# Altium PCB PCB1.PcbDoc
Units mil, origin at the board's own origin, x right, y up, seen from the top; angles counter-clockwise.
Board outline 5872 x 3804 mil, 4 copper layers (LVDS, GND, REC_POW, CMOS), stack 24.449 mil thick; 31 components, 58 nets, 331 pads, 4 vias.
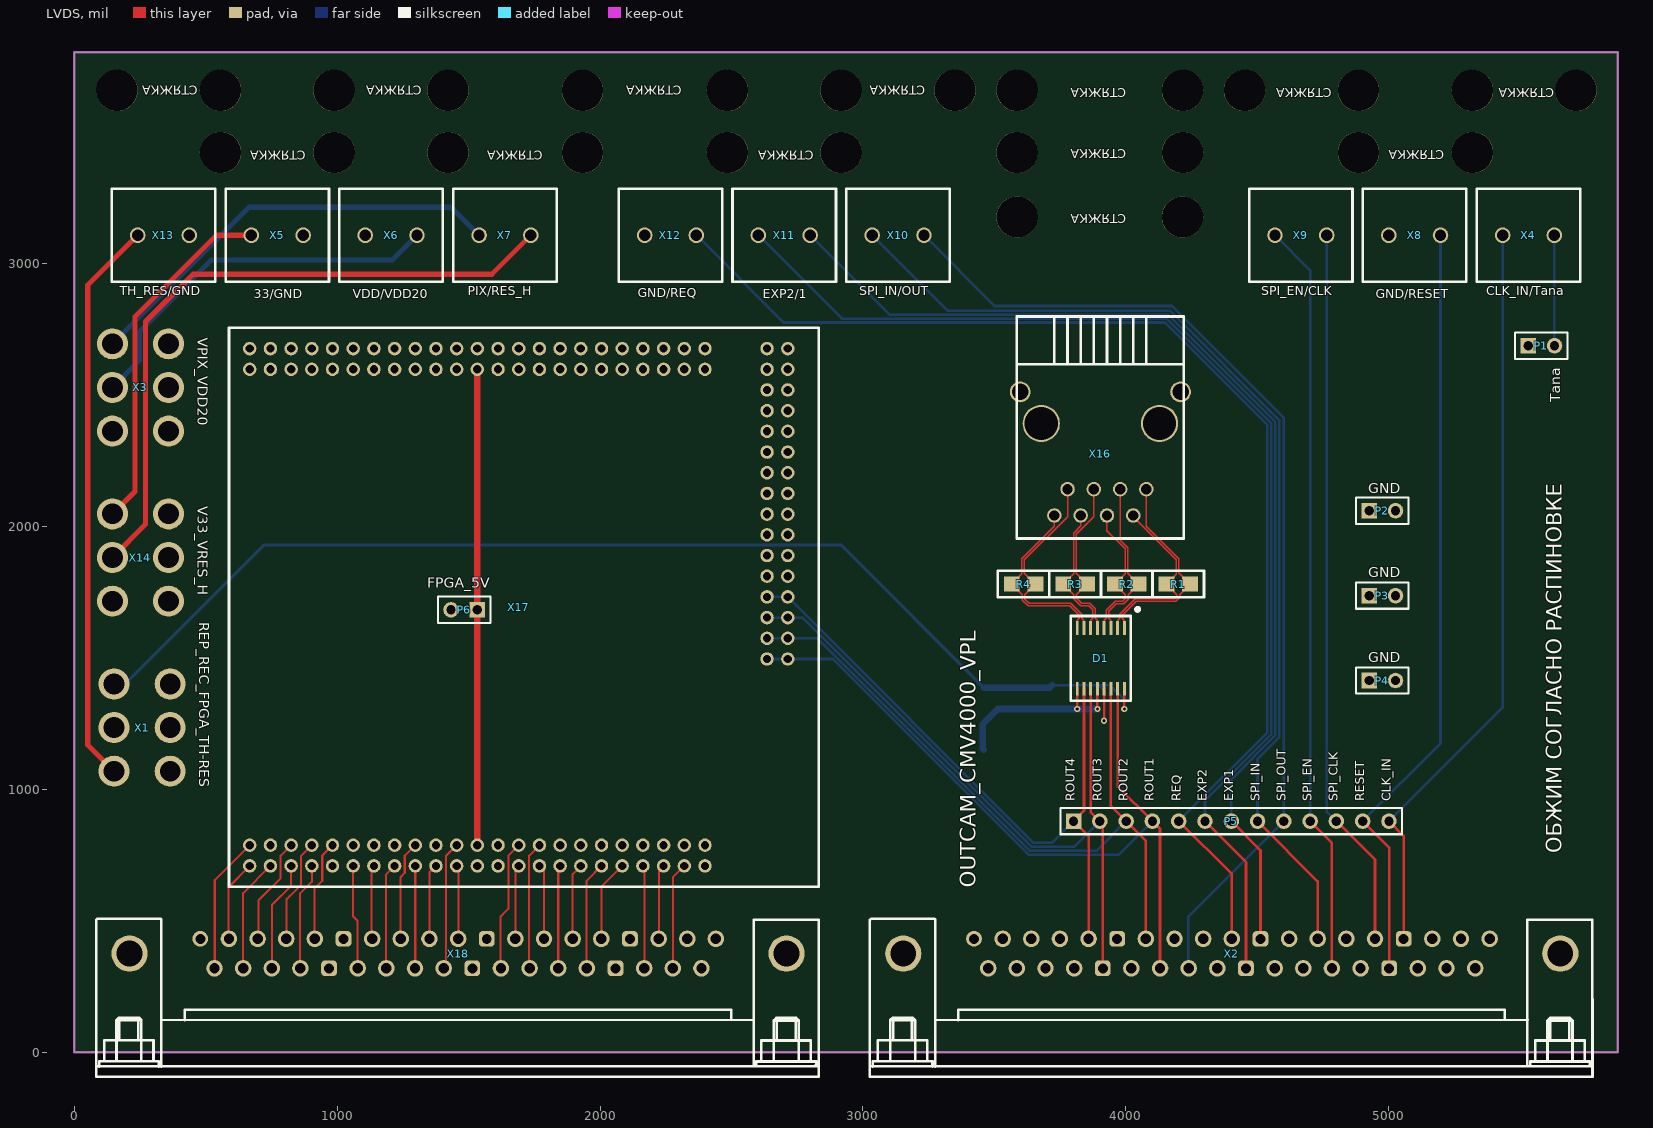
[diagram p0: LVDS view]
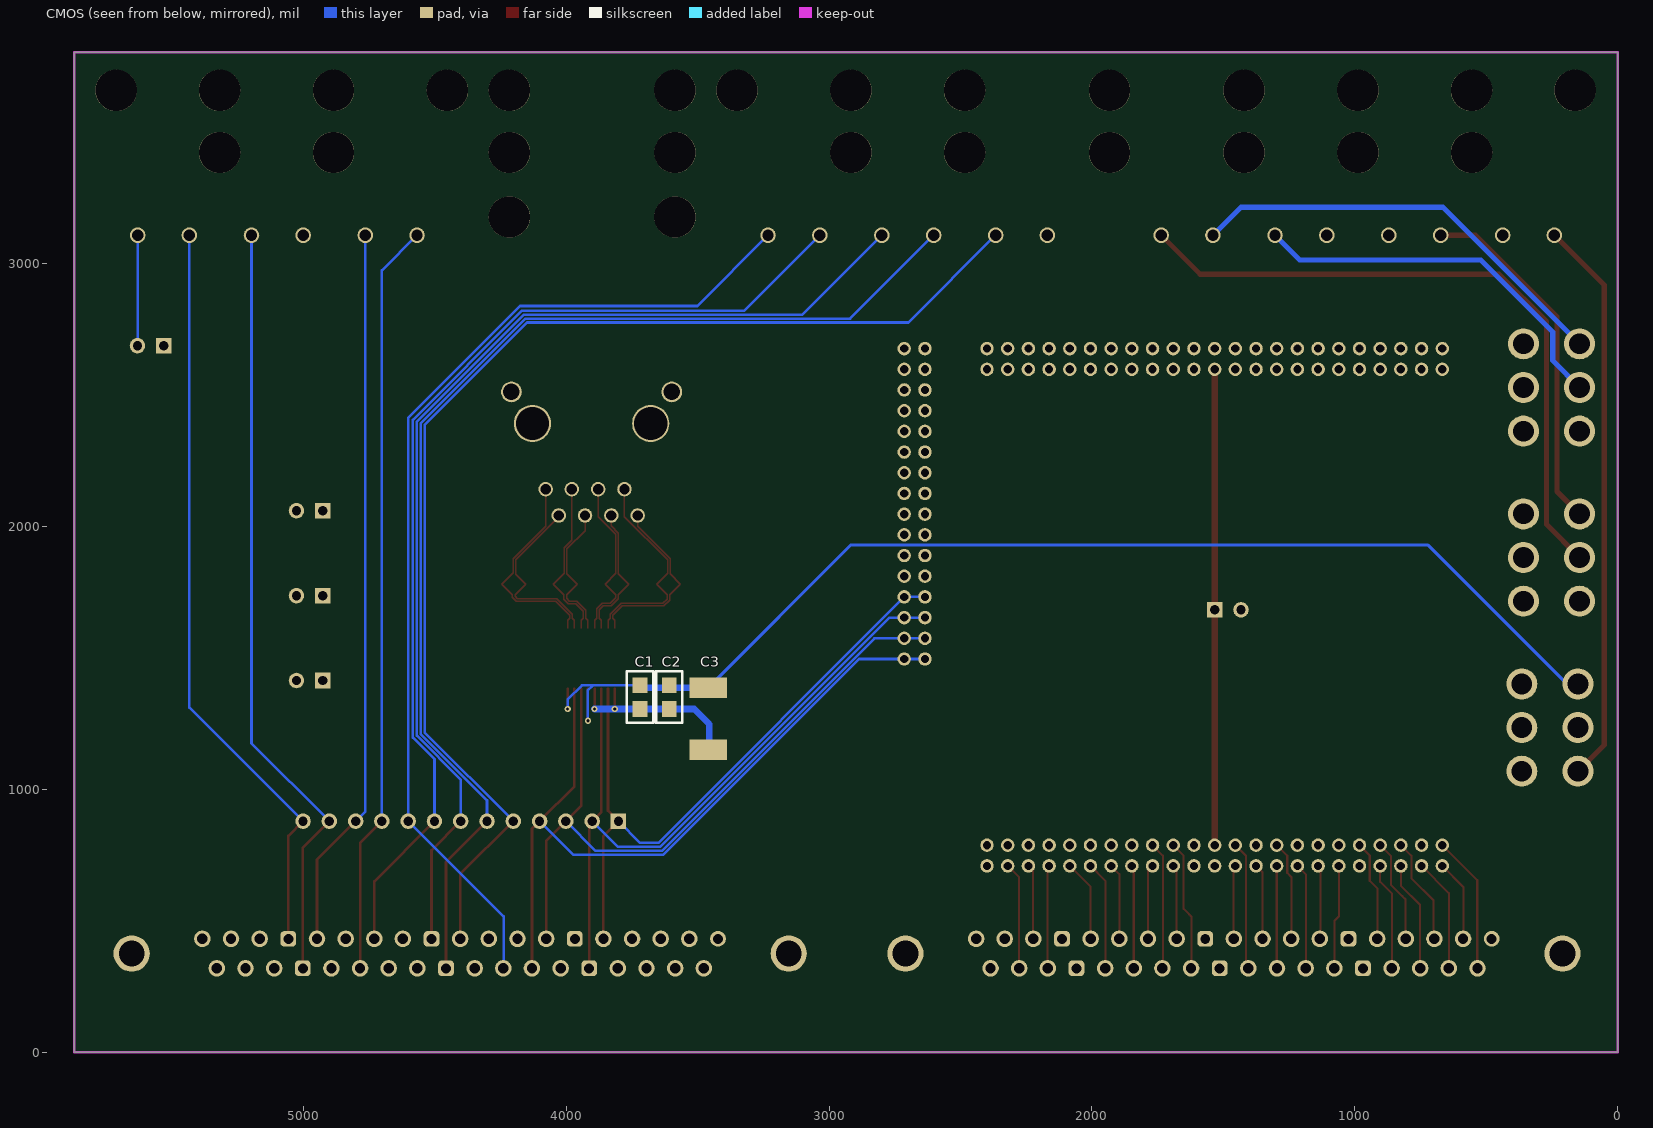
[diagram p1: CMOS view, seen from below]
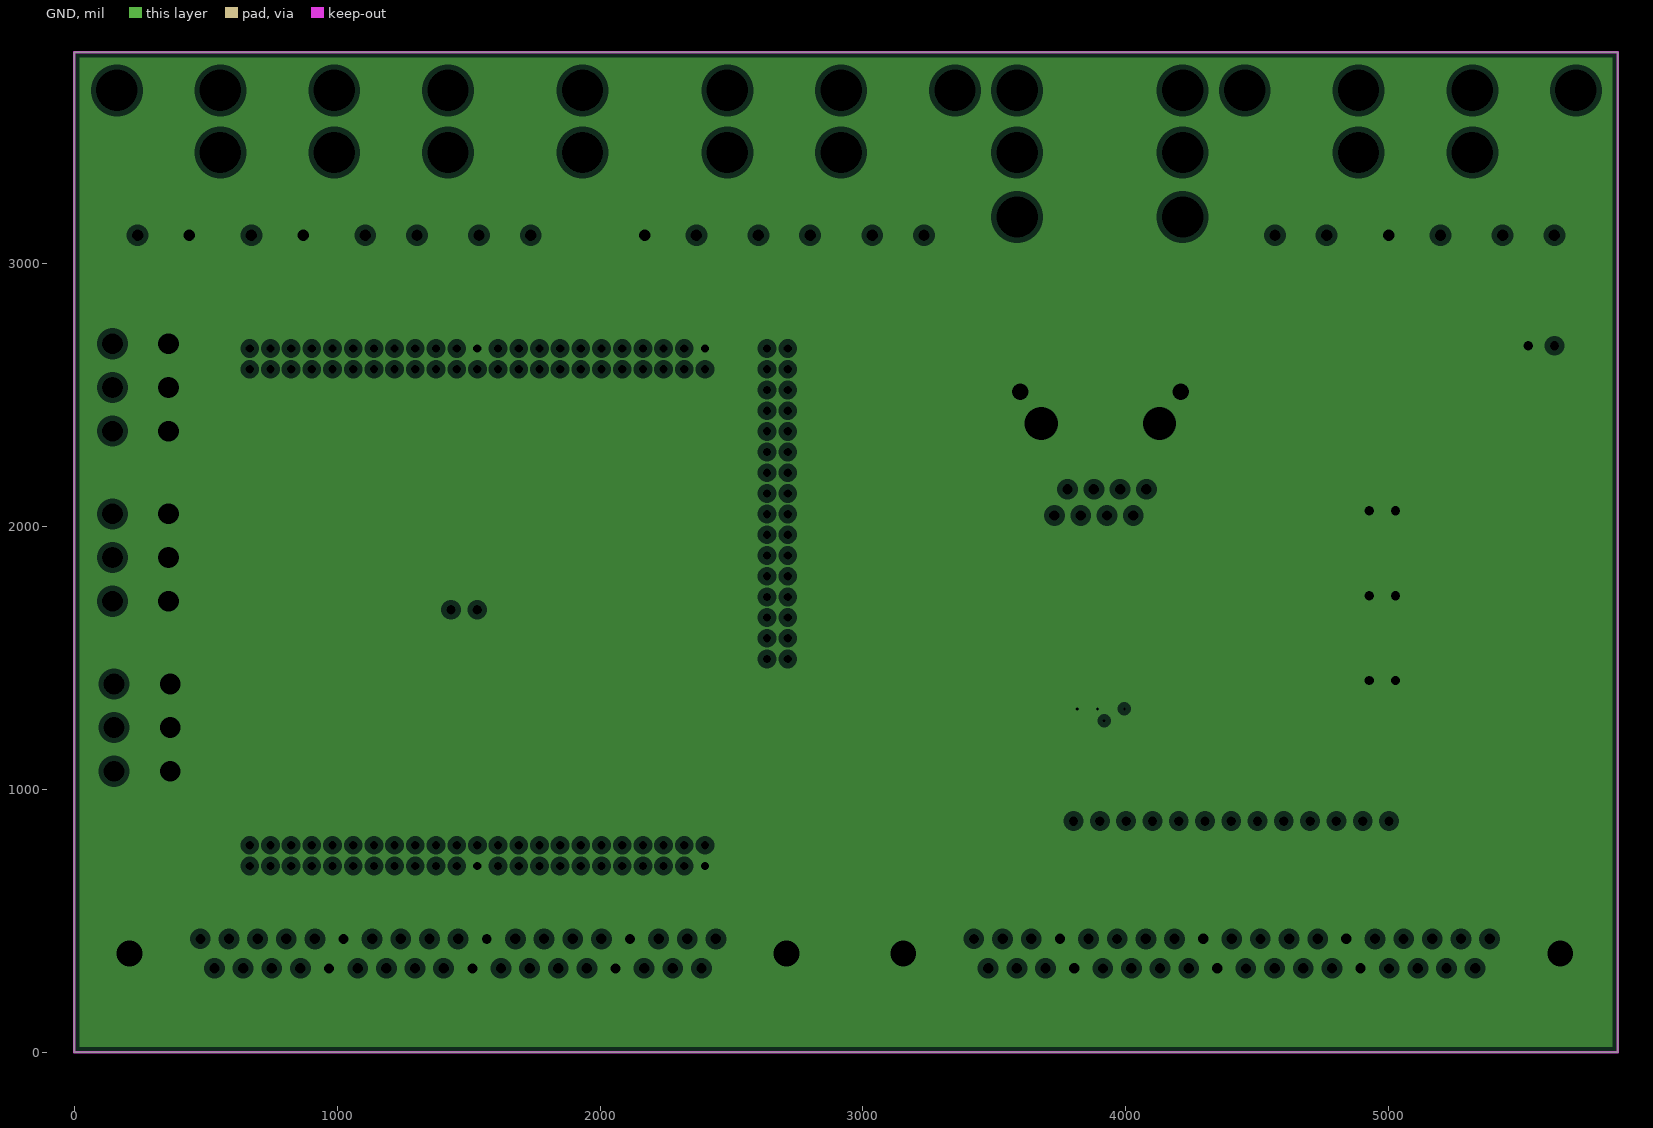
[diagram p2: GND, clearances drawn from the general rule]
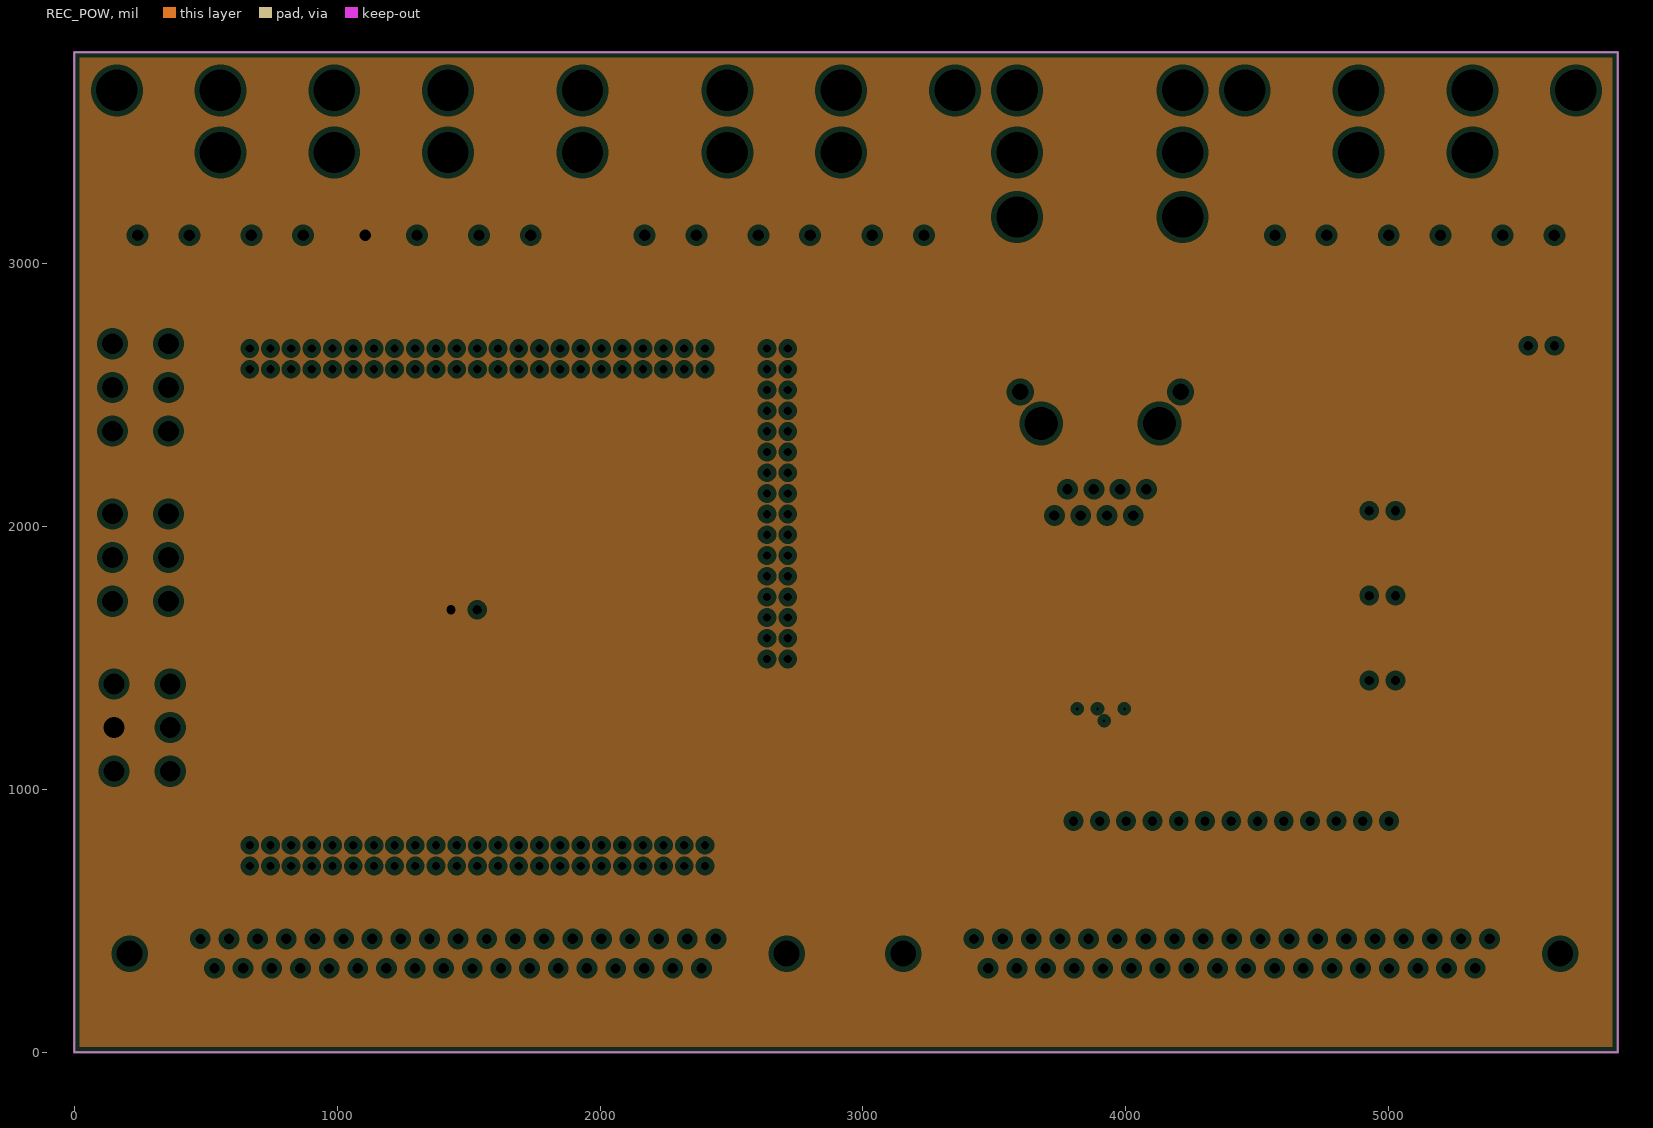
[diagram p3: REC_POW, clearances drawn from the general rule]

## Layer stack, top to bottom
Top Solder: solder mask 0.4, Solder Resist, Dk 3.5
LVDS: signal copper 0.7087
Dielectric 1: core 5.9055, FR-4, Dk 4.2
GND: plane copper 1.4169, net GND
Dielectric 3: prepreg 5, Dk 4.2
REC_POW: plane copper 0.7087, net 5V
Dielectric 2: core 10, Dk 4.2
CMOS: signal copper 0.7087
Bottom Solder: solder mask 0.4, Solder Resist, Dk 3.5

## Board outline
0,0 5872,0 5872,3804 0,3804

## Design rules (kind name [scope] priority, off if disabled: settings)
Clearance [All] p1: gap=4.92
DiffPairsRouting [All] p1: maxlimit=5 minlimit=5 mostfreqgap=5 toplayer_minwidth=5 toplayer_maxwidth=5 toplayer_prefwidth=5 bottomlayer_minwidth=5 bottomlayer_maxwidth=5 bottomlayer_prefwidth=5 maxuncoupledlength=500
HoleSize [All] p1: absolutevalues=TRUE maxlimit=808.66 minlimit=1 maxpercent=80.000 minpercent=20.000
PlaneClearance [All] p1: clearance=20
PlaneConnect [All] p1: planeconnectstyle=Relief reliefexpansion=20 reliefentries=4 reliefconductorwidth=10 reliefairgap=10
PolygonConnect [All] p1: connectstyle=Relief reliefconductorwidth=10 reliefentries=4 polygonreliefangle="90 Angle" airgapwidth=10
RoutingVias [All] p1: holewidth=11.81 width=23.62 viastyle="Through Hole" minholewidth=11.81 minwidth=23.62 maxholewidth=11.81 maxwidth=23.62
SolderMaskExpansion [All] p1: expansion=4
Width [All] p1: maxlimit=88.74 minlimit=4.92 preferedwidth=5
25 further rules are at their usual default settings.

## Classes and differential pairs
differential pair RIN1: +RIN1_P -RIN1_N
differential pair RIN2: +RIN2_P -RIN2_N
differential pair RIN3: +RIN3_P -RIN3_N
differential pair RIN4: +RIN4_P -RIN4_N

## Components (designator, comment, footprint, x,y, rotation, side; value= is the part's Value field where it differs from the comment)
C1 "0,01" CAP_SMALL 3670,1252 r90 bottom
C2 "0,1" CAP_SMALL 3559,1252 r90 bottom
C3 "22,0" Cap_BIG 3385,1430 r0 bottom
D1 "SN65LVDS048A" "SN65LVDS048A (4LVDS)" 3995,1613 r180 top
P1 "Tana" HDR1X2 5532,2688 r0 top
P2 "GND" HDR1X2 4927,2060 r0 top
P3 "GND" HDR1X2 4927,1737 r0 top
P4 "GND" HDR1X2 4927,1414 r0 top
P5 "Header 13" HDR1X13 3802,879 r0 top
P6 "FPGA_5V" HDR1X2 1533,1683 r180 top
R1 "100" RES 4298,1732 r90 top
R2 "100" RES 4102,1732 r90 top
R3 "100" RES 3710,1830 r270 top
R4 "100" RES 3514,1830 r270 top
X1 "REP_REC_FPGA_TH-RES" POWER 451,1235 r90 top
X2 "FEMALE" CHEAP_CONN_FEMALE 5654,375 r180 top
X3 "VPIX_VDD20" POWER 444.69,2529 r90 top
X4 "CLK_IN/Tana" KLEMMNIK_2 5434.39,3108.27 r0 top
X5 "33/GND" KLEMMNIK_2 673.61,3108.27 r0 top
X6 "VDD/VDD20" KLEMMNIK_2 1106.68,3108.27 r0 top
X7 "PIX/RES_H" KLEMMNIK_2 1539.75,3108.27 r0 top
X8 "RES/GND" KLEMMNIK_2 5198.17,3108.27 r180 top
X9 "CLK/EN" KLEMMNIK_2 4765.1,3108.27 r180 top
X10 "OUT/IN" KLEMMNIK_2 3232.66,3108.27 r180 top
X11 "EXP1/2" KLEMMNIK_2 2799.59,3108.27 r180 top
X12 "REQ/GND" KLEMMNIK_2 2366.52,3108.27 r180 top
X13 "T1/GND" KLEMMNIK_2 240.54,3108.27 r0 top
X14 "V33_VRES_H" POWER 444.69,1882 r90 top
X16 "RJ45" RJ45 4079,2142 r180 top
X17 "Core3S500E" Core3S500E 2399.43,2677 r270 top
X18 "MALE" CHEAP_CONN_MALE 210,375 r0 top

## Footprints (in the part's own frame and the unit in brackets; to place one, negate y for a bottom-side part, rotate by r counter-clockwise, add the part's x,y. Pads: shape width x height; smd on the part's side, far side on the other; paste and mask are expansions set on the pad)
Cap_BIG [mm] "FROM_MAX"
  rect 3.6x2 smd: 1(1.905,7.092) 2(1.905,1.092)
  body extent 0,-0.01 3.81,8.19, height 2.54
CAP_SMALL [mil] "FROM_MAX"
  rect 60x55.98 smd: 1(53.71,50) 2(143.71,50)
  silkscreen extent 1,0 197,100, body extent 20,18 178,82, height 100
CHEAP_CONN_FEMALE [mm] "CHEAP_CONN_FEMALE"
  round 1.6 hole 1: 1(6.833,-1.422) 2(9.601,-1.422) 3(12.37,-1.422) 5(17.907,-1.422) 6(20.676,-1.422) 7(23.444,-1.422) 8(26.213,-1.422) 10(31.75,-1.422) 11(34.519,-1.422) 12(37.287,-1.422) 13(40.056,-1.422) 15(45.593,-1.422) 16(48.362,-1.422) 17(51.13,-1.422) 18(53.899,-1.422) 20(8.23,1.422) 21(10.998,1.422) 22(13.767,1.422) 24(19.304,1.422) 25(22.073,1.422) 26(24.841,1.422) 27(27.61,1.422) 29(33.147,1.422) 30(35.916,1.422) 31(38.684,1.422) 32(41.453,1.422) 34(46.99,1.422) 35(49.759,1.422) 36(52.527,1.422) 37(55.296,1.422)
  rrect50% 1.524x1.524 hole 0.965: 4(15.138,-1.422) 9(28.981,-1.422) 14(42.824,-1.422) 23(16.535,1.422) 28(30.378,1.422) 33(44.221,1.422)
  round 1.524 hole 0.965: 19(56.667,-1.422)
  round 3.5 hole 2.5: 38(0,0) 39(63.5,0)
  silkscreen extent -3.11,-3.36 66.72,11.92
CHEAP_CONN_MALE [mm] "CHEAP_CONN_MALE"
  round 1.524 hole 0.965: 1(6.833,1.422)
  round 1.6 hole 1: 2(9.601,1.422) 3(12.37,1.422) 4(15.138,1.422) 5(17.907,1.422) 7(23.444,1.422) 8(26.213,1.422) 9(28.981,1.422) 10(31.75,1.422) 12(37.287,1.422) 13(40.056,1.422) 14(42.824,1.422) 15(45.593,1.422) 17(51.13,1.422) 18(53.899,1.422) 19(56.667,1.422) 20(8.204,-1.422) 21(10.973,-1.422) 22(13.741,-1.422) 23(16.51,-1.422) 25(22.047,-1.422) 26(24.816,-1.422) 27(27.584,-1.422) 28(30.353,-1.422) 30(35.89,-1.422) 31(38.659,-1.422) 32(41.427,-1.422) 33(44.196,-1.422) 35(49.733,-1.422) 36(52.502,-1.422) 37(55.27,-1.422)
  rrect50% 1.524x1.524 hole 0.965: 6(20.676,1.422) 11(34.519,1.422) 16(48.362,1.422) 24(19.279,-1.422) 29(33.122,-1.422) 34(46.965,-1.422)
  round 3.5 hole 2.5: 38(63.5,0) 39(0,0)
  silkscreen extent -3.22,-11.92 66.61,3.36
Core3S500E [mm]
  round 1.3 hole 0.8: 1(0,0) 2(2,0) 3(0,-2) 4(2,-2) 5(0,-4) 6(2,-4) 7(0,-6) 8(2,-6) 9(0,-8) 10(2,-8) 11(0,-10) 12(2,-10) 13(0,-12) 14(2,-12) 15(0,-14) 16(2,-14) 17(0,-16) 18(2,-16) 19(0,-18) 20(2,-18) 21(0,-20) 22(2,-20) 23(0,-22) 24(2,-22) 25(0,-24) 26(2,-24) 27(0,-26) 28(2,-26) 29(0,-28) 30(2,-28) 31(0,-30) 32(2,-30) 33(0,-32) 34(2,-32) 35(0,-34) 36(2,-34) 37(0,-36) 38(2,-36) 39(0,-38) 40(2,-38) 41(0,-40) 42(2,-40) 43(0,-42) 44(2,-42) 45(0,-44) 46(2,-44) 47(48,0) 48(50,0) 49(48,-2) 50(50,-2) 51(48,-4) 52(50,-4) 53(48,-6) 54(50,-6) 55(48,-8) 56(50,-8) 57(48,-10) 58(50,-10) 59(48,-12) 60(50,-12) 61(48,-14) 62(50,-14) 63(48,-16) 64(50,-16) 65(48,-18) 66(50,-18) 67(48,-20) 68(50,-20) 69(48,-22) 70(50,-22) 71(48,-24) 72(50,-24) 73(48,-26) 74(50,-26) 75(48,-28) 76(50,-28) 77(48,-30) 78(50,-30) 79(48,-32) 80(50,-32) 81(48,-34) 82(50,-34) 83(48,-36) 84(50,-36) 85(48,-38) 86(50,-38) 87(48,-40) 88(50,-40) 89(48,-42) 90(50,-42) 91(48,-44) 92(50,-44) 93(30,8) 94(30,6) 95(28,8) 96(28,6) 97(26,8) 98(26,6) 99(24,8) 100(24,6) 101(22,8) 102(22,6) 103(20,8) 104(20,6) 105(18,8) 106(18,6) 107(16,8) 108(16,6) 109(14,8) 110(14,6) 111(12,8) 112(12,6) 113(10,8) 114(10,6) 115(8,8) 116(8,6) 117(6,8) 118(6,6) 119(4,8) 120(4,6) 121(2,8) 122(2,6) 123(0,8) 124(0,6)
  silkscreen extent -2,-46 52,11
HDR1X2 [mm] "Connector; Header; 2 Position"
  rect 1.5x1.5 hole 0.9: 1(0,0)
  round 1.5 hole 0.9: 2(2.54,0)
  silkscreen extent -1.27,-1.27 3.81,1.27
HDR1X13 [mm] "Connector; Header; 13 Position"
  rect 1.5x1.5 hole 0.9: 1(0,0)
  round 1.5 hole 0.9: 2(2.54,0) 3(5.08,0) 4(7.62,0) 5(10.16,0) 6(12.7,0) 7(15.24,0) 8(17.78,0) 9(20.32,0) 10(22.86,0) 11(25.4,0) 12(27.94,0) 13(30.48,0)
  silkscreen extent -1.27,-1.27 31.75,1.27
KLEMMNIK_2 [mm]
  round 1.5 hole 1.1: 1(0,0) 2(5,0)
  silkscreen extent -2.5,-4.5 7.5,4.5
POWER [mm] "POWER"
  round 3 hole 2: 1(4.217,7.62) 2(0,7.62) 3(-4.217,7.62) 4(4.217,2.198) 5(0,2.198) 6(-4.217,2.198)
RES [mil] "FROM_MAX"
  rect 55.98x60 smd: 1(49,52.71) 2(49,142.71)
  silkscreen extent -1,0 99,196, body extent 17,19 81,177, height 100
RJ45 [mm]
  round 1.4 hole 1: 1(0,0) 2(1.27,2.54) 3(2.54,0) 4(3.81,2.54) 5(5.08,0) 6(6.35,2.54) 7(7.62,0) 8(8.89,2.54)
  round 3.6 hole 3.2: 9(-1.27,-6.35) 10(10.16,-6.35)
  round 2 hole 1.6: 11(-3.302,-9.398) 12(12.192,-9.398)
  silkscreen extent -3.61,-16.69 12.54,4.76
"SN65LVDS048A (4LVDS)" [mm]
  rect 0.28x1.35 smd: 1(0,0) 2(0.65,0) 3(1.3,0) 4(1.95,0) 5(2.6,0) 6(3.25,0) 7(3.9,0) 8(4.55,0) 9(4.55,5.85) 10(3.9,5.85) 11(3.25,5.85) 12(2.6,5.85) 13(1.95,5.85) 14(1.3,5.85) 15(0.65,5.85) 16(0,5.85)
  silkscreen extent -1.49,-2.03 5.18,7

## Part data
C1 C2: library part CAP_SMALL
C3: library part CAP_BIG
D1: library part "SN65LVDS048A (4LVDS)"
P1 P2 P3 P4 P6: library part "Header 2", "Header, 2-Pin"
P5: "Header, 13-Pin"
R1 R2 R3 R4: library part RES
X1 X3 X14: library part POWER
X2: library part CHEAP_CON_37_FEMALE
X4 X5 X6 X7 X8 X9 X10 X11 X12 X13: library part KLEMMNIK_2
X18: library part CHEAP_CON_37_MALE

## Free pads (board coordinates)
  round 157.48 hole 157.48 mask+0: 0(161.8,3659.45) 0(555.5,3423.23) 0(555.5,3659.45) 0(988.57,3423.23) 0(988.57,3659.45) 0(1421.64,3423.23) 0(1421.64,3659.45) 0(1933.45,3423.23) 0(1933.45,3659.45) 0(2484.63,3423.23) 0(2484.63,3659.45) 0(2917.7,3423.23) 0(2917.7,3659.45) 0(3350.77,3659.45) 0(3586.99,3177.64) 0(3586.99,3423.23) 0(3586.99,3659.45) 0(4216.91,3177.64) 0(4216.91,3423.23) 0(4216.91,3659.45) 0(4453.13,3659.45) 0(4886.21,3423.23) 0(4886.21,3659.45) 0(5319.28,3423.23) 0(5319.28,3659.45) 0(5712.98,3659.45)

## Via types
v1: diameter 23.62, hole 11.81, LVDS to CMOS, 4 vias

## Nets (pads, with @x,y where several pads share a name; then routed paths per layer and width w, separated by ;. In a path a pad name is that pad's centre, name@x,y a point inside that pad or via, vN(x,y) a via of type N, cw(c..) or ccw(c..) an arc to the next point about the centre after c; other vN are vias at no path point)
3.3V: C1.2 C2.2 C3.2 D1.13 D1.16 X1.1 | length 4691.6
  LVDS w10: v1(3918,1261) 3918.23,1261.23 D1.13 ; v1(3995,1306) D1.16
  CMOS w10: C1.2 3899.29,1395.71 ; v1(3918,1261) 3919,1262 3919,1376 3899.29,1395.71 ; v1(3995,1306) 3995,1342 3941.29,1395.71 3899.29,1395.71
  CMOS w11.81: X1.1 194.04,1401.04 723,1930 2917,1930 C3.2
  CMOS w25: C3.2 3711.29,1387 C1.2
5V: P6.2 X1.2 X6.1
20_POW: X3.2 X6.2 | length 1462.4
  CMOS w19.68: X3.2 247,2631.32 247,2740 521,3014 1209.26,3014 X6.2
33_POW: X5.1 X14.1 | length 1357.4
  LVDS w19.68: X14.1 230,2133.36 230,2798 540.27,3108.27 X5.1
CLK_IN: P5.13 X2.4 X4.1 | length 2879.6
  LVDS w10: P5.13 5058,823 X2.4
  CMOS w10: P5.13 5434.39,1311.39 X4.1
EXP1: P5.7 X2.9 X11.1 | length 4146.4
  LVDS w10: P5.7 4513,768 X2.9
  CMOS w10: X11.1 3101.78,2806.08 4161.92,2806.08 4569.08,2398.92 4569.08,1203.88 4402,1036.8 P5.7
EXP2: P5.6 X2.28 X11.2 | length 4490.6
  LVDS w10: P5.6 4458,723 X2.28
  CMOS w10: X11.2 2919.85,2791.16 4155.74,2791.16 4554.16,2392.74 4554.16,1210.06 4302,957.9 P5.6
FPGA_5V: P6.1 X17.24 X17.69 | length 1811
  LVDS w25: X17.69 X17.24
FRAME_REQ: P5.5 X2.10 X12.1 | length 4650.6
  LVDS w10: P5.5 4404,677 X2.10
  CMOS w10: X12.1 2698.55,2776.24 4149.56,2776.24 4539.24,2386.56 4539.24,1216.24 P5.5
GND: C1.1 C2.1 C3.1 D1.9 D1.12 P1.1 P2.1 P2.2 P3.1 P3.2 P4.1 P4.2 X1.4 X1.5 X1.6 X2.6 X2.11 X2.16 X2.24 X2.29 X2.34 X2.38 X2.39 X3.4 X3.5 X3.6 X5.2 X8.2 X12.2 X13.2 X14.4 X14.5 X14.6 X16.9 X16.10 X16.11 X16.12 X17.1 X17.23 X17.48 X17.70 X18.6 X18.11 X18.16 X18.24 X18.29 X18.34 X18.38 X18.39 | length 713.5
  LVDS w10: D1.9 3815.87,1306.13 v1(3816,1306) ; D1.12 3892.64,1306.36 v1(3893,1306)
  CMOS w25: C3.1 3456,1154.78 3456,1248 3513.71,1305.71 C2.1 C1.1 3892.71,1305.71 v1(3893,1306)
P0.0_C: X17.56 X18.15 | length 310.4
  LVDS w7.87: X18.15 2005,629.02 X17.56
P0.1_C: X17.58 X18.33 | length 413
  LVDS w7.87: X18.33@1949,319 1949,651.76 X17.58
P0.2_C: X17.60 X18.14 | length 290.3
  LVDS w7.87: X18.14 1896,677.5 X17.60
P0.3_C: X17.62 X18.32 | length 392.5
  LVDS w7.87: X18.32 1841,701.24 X17.62
P0.4_C: X17.64 X18.13 | length 284.7
  LVDS w7.87: X17.64 1787,691.01 X18.13
P0.5_C: X17.63 X18.31 | length 484.6
  LVDS w7.87: X18.31@1730,319 1730,692 1730,747.73 X17.63
P0.6_C: X17.66 X18.12 | length 282.8
  LVDS w7.87: X18.12 1678,695.73 X17.66
P0.7_C: X17.65 X18.30 | length 496.7
  LVDS w7.87: X18.30@1622,319 1622,516 1630,524 1651,545 1651,686 1651,747.47 X17.65
P1.0_C: X17.72 X18.10 | length 280.2
  LVDS w7.87: X17.72 1461,702.05 X18.10@1461,431
P1.1_C: X17.71 X18.28 | length 485
  LVDS w7.87: X18.28@1414,319 1414,694 1414,746.69 X17.71
P1.2_C: X17.74 X18.9 | length 287.8
  LVDS w7.87: X18.9 1351,683.69 X17.74
P1.3_C: X17.76 X18.27 | length 389.5
  LVDS w7.87: X18.27@1297.07,319 X17.76
P1.4_C: X17.75 X18.8 | length 379.5
  LVDS w7.87: X18.8@1241,431 1241,666 1257,682 1257,747.17 X17.75
P1.5_C: X17.78 X18.26 | length 403.3
  LVDS w7.87: X18.26@1185,319 1185,675.17 X17.78
P1.6_C: X17.80 X18.7 | length 281.1
  LVDS w7.87: X18.7@1131,431 1131,699.91 X17.80
P1.7_C: X17.82 X18.25 | length 396.2
  LVDS w7.87: X17.82 1060.85,516.15 1077,500 X18.25@1077,319
P2.0_C: X17.83 X18.5 | length 384.4
  LVDS w7.87: X18.5@914,431 914,623 943,652 943,694 943,748.13 X17.83
P2.1_C: X17.86 X18.23 | length 408.3
  LVDS w7.87: X18.23@858,319 858,603 903.37,648.37 X17.86
P2.2_C: X17.85 X18.4 | length 396.2
  LVDS w7.87: X18.4@807,431 807,581 819,593 863,637 863,699 863,746.87 X17.85
P2.3_C: X17.88 X18.22 | length 419.6
  LVDS w7.87: X18.22@752,319 752,561 824.63,633.63 X17.88
P2.4_C: X17.87 X18.3 | length 411.2
  LVDS w7.87: X18.3@700.5,427.5 700.5,577.5 785,662 785,679 785,747.61 X17.87
P2.5_C: X17.90 X18.21 | length 432.5
  LVDS w7.87: X18.21 642,604.61 X17.90
P2.6_C: X17.92 X18.2 | length 310.7
  LVDS w7.87: X18.2@587,431 587,628.35 X17.92
P2.7_C: X17.91 X18.20 | length 523.4
  LVDS w7.87: X18.20@534,319 534,654.09 X17.91
PFI1_C: X17.50 X18.36 | length 407.6
  LVDS w7.87: X18.36 2277,664.8 X17.50
PFI2_C: X17.52 X18.17 | length 284.9
  LVDS w7.87: X18.17@2224,431 2224,690.54 X17.52
PFI3_C: X17.54 X18.35 | length 392.3
  LVDS w7.87: X17.54 2170,701.71 X18.35@2170,319
PIX_POW: X3.1 X7.1 | length 1654.6
  CMOS w19.68: X3.1 664.64,3215 1433.02,3215 X7.1
RES_H_POW: X7.2 X14.2 | length 2551.9
  LVDS w19.68: X14.2 271,2008.32 271,2780 451,2960 1588.33,2960 X7.2
RIN1_N: D1.1 R1.1 X16.1 | length 796.6
  LVDS w5: D1.1 3995,1643 3987,1651 3987,1662.86 4040.14,1716 4191,1716 4205.29,1730.29 4205.29,1741 R1.1 4202,1824.29 4202,1878.14 4079,2001.14 X16.1
RIN1_P: D1.2 R1.2 X16.2 | length 710.2
  LVDS w5: D1.2 3969.41,1643 3977,1650.59 3977,1667 4036,1726 4186.86,1726 4195.29,1734.43 4195.29,1741 R1.2 4192,1817.71 4192,1874 4029,2037 X16.2
RIN2_N: D1.4 R2.2 X16.4 | length 539.8
  LVDS w5: D1.4 3918.23,1643 3926,1650.77 3926,1681.14 3960.86,1716 3988.29,1716 3999.29,1727 3999.29,1741 R2.2 3998,1819.71 3998,1915 3929,1984 X16.4
RIN2_P: D1.3 R2.1 X16.3 | length 624.4
  LVDS w5: D1.3 3943.82,1643 3936,1650.82 3936,1677 3965,1706 3992.43,1706 4009.29,1722.86 4009.29,1741 R2.1 4008,1822.29 4008,1919.14 3979,1948.14 X16.3
RIN3_N: D1.5 R3.2 X16.5 | length 641.1
  LVDS w5: X16.5 3879,2037.86 3812,1970.86 3812,1821.71 R3.2 3812.71,1741 3812.71,1729 3833.71,1708 3864.14,1708 3885,1687.14 3885,1650.64 3892.64,1643 D1.5
RIN3_P: D1.6 R3.1 X16.6 | length 524.1
  LVDS w5: X16.6 3829,2002 3802,1975 3802,1820.29 R3.1 3802.71,1741 3802.71,1724.86 3829.57,1698 3860,1698 3875,1683 3875,1650.95 3867.05,1643 D1.6
RIN4_N: D1.8 R4.1 X16.8 | length 698.1
  LVDS w5: X16.8 3729,2001 3605,1877 3605,1819.29 R4.1 3606.71,1741 3606.71,1719.86 3628.57,1698 3787,1698 3823,1662 3823,1650.13 3815.87,1643 D1.8
RIN4_P: D1.7 R4.2 X16.7 | length 816.7
  LVDS w5: X16.7 3779,2036.86 3615,1872.86 3615,1822.71 R4.2 3616.71,1741 3616.71,1724 3632.71,1708 3791.14,1708 3833,1666.14 3833,1651.46 3841.46,1643 D1.7
ROUT1: D1.15 P5.4 X2.31 X17.93 X17.94 | length 2958.3
  LVDS w10: D1.15 3969.41,1011.59 P5.4 4131,850 X2.31
  CMOS w10: X17.94 X17.93 2886.1,1495.9 3630.76,751.24 3974.24,751.24 P5.4
ROUT2: D1.14 P5.3 X2.13 X17.95 X17.96 | length 2754.8
  LVDS w10: D1.14 3943.82,937.18 P5.3 4077,804 X2.13
  CMOS w10: X17.96 X17.95 2828.46,1574.64 3636.94,766.16 3889.16,766.16 P5.3
ROUT3: D1.11 P5.2 X2.33 X17.97 X17.98 | length 2750.9
  LVDS w10: D1.11 3867.05,913.95 P5.2 3913,868 X2.33
  CMOS w10: X17.98 X17.97 2770.83,1653.38 3643.13,781.08 3804.08,781.08 P5.2
ROUT4: D1.10 P5.1 X2.15 X17.99 X17.100 | length 2580.4
  LVDS w10: D1.10 3841.46,918.46 P5.1 3859,822 X2.15
  CMOS w10: X17.100 X17.99 2714.39,1731.61 3650,796 3719,796 P5.1
SPI_CLK: P5.11 X2.5 X9.1 | length 2753.4
  LVDS w10: P5.11 4949,732 X2.5
  CMOS w10: X9.1 4765.1,915.91 P5.11
SPI_EN: P5.10 X2.25 X9.2 | length 2879.1
  LVDS w10: P5.10 4785,796 X2.25
  CMOS w10: X9.2 4702,2974.51 P5.10
SPI_IN: P5.8 X2.7 X10.2 | length 3942.4
  LVDS w10: P5.8 4731,650 X2.7
  CMOS w10: X10.2 3323.08,2821 4168.1,2821 4584,2405.1 4584,1197 4502,1115 P5.8
SPI_OUT: P5.9 X2.30 X10.1 | length 3901.8
  CMOS w10: X10.1 3501.93,2839 4175.56,2839 4602,2412.56 P5.9 4239,516 4239,320 X2.30
SYS_RESET: P5.12 X2.23 X8.1 | length 2953.8
  LVDS w10: P5.12 5003,778 X2.23
  CMOS w10: P5.12 5198.17,1175.17 X8.1
TANA: P1.2 X4.2 | length 420.6
  CMOS w10: X4.2 5631.24,2688.76 P1.2
TH_RES: X1.3 X13.1 | length 2159.2
  LVDS w19.68: X1.3 51,1168.96 51,2918.73 X13.1
pads on no net: X2.1 X2.2 X2.3 X2.8 X2.12 X2.14 X2.17 X2.18 X2.19 X2.20 X2.21 X2.22 X2.26 X2.27 X2.32 X2.35 X2.36 X2.37 X3.3 X14.3 X17.2 X17.3 X17.4 X17.5 X17.6 X17.7 X17.8 X17.9 X17.10 X17.11 X17.12 X17.13 X17.14 X17.15 X17.16 X17.17 X17.18 X17.19 X17.20 X17.21 X17.22 X17.25 X17.26 X17.27 X17.28 X17.29 X17.30 X17.31 X17.32 X17.33 X17.34 X17.35 X17.36 X17.37 X17.38 X17.39 X17.40 X17.41 X17.42 X17.43 X17.44 X17.45 X17.46 X17.47 X17.49 X17.51 X17.53 X17.55 X17.57 X17.59 X17.61 X17.67 X17.68 X17.73 X17.77 X17.79 X17.81 X17.84 X17.89 X17.101 X17.102 X17.103 X17.104 X17.105 X17.106 X17.107 X17.108 X17.109 X17.110 X17.111 X17.112 X17.113 X17.114 X17.115 X17.116 X17.117 X17.118 X17.119 X17.120 X17.121 X17.122 X17.123 X17.124 X18.1 X18.18 X18.19 X18.37

## Polygon pours and split planes (outlines as drawn)
GND on GND (split plane): 5851.9,20.1 20.1,20.1 20.1,3783.9 5851.9,3783.9
5V on REC_POW (split plane): 5851.9,20.1 20.1,20.1 20.1,3783.9 5851.9,3783.9

## Keep-outs
Keep-Out Layer:
  the board outline again, w10

## Silkscreen, mask and mechanical layers (free items; w line width, h text height)
Top Overlay:
  text "СТЯЖКА" at 470.04,3689 h60 r180
  text "СТЯЖКА" at 1321,3689 h60 r180
  text "СТЯЖКА" at 2311,3689 h60 r180
  text "СТЯЖКА" at 3238,3689 h60 r180
  text "СТЯЖКА" at 4003,3678.65 h60 r180
  text "СТЯЖКА" at 4784,3678.65 h60 r180
  text "СТЯЖКА" at 5630.58,3678.65 h60 r180
  text "СТЯЖКА" at 4003,3447 h60 r180
  text "СТЯЖКА" at 880,3442 h60 r180
  text "СТЯЖКА" at 1782,3442 h60 r180
  text "СТЯЖКА" at 2813,3442 h60 r180
  text "СТЯЖКА" at 5212,3442.43 h60 r180
  text "СТЯЖКА" at 4003,3200 h60 r180
  text "TH_RES/GND" at 173,2868 h60
  text "PIX/RES_H" at 1497,2868 h60
  text "SPI_IN/OUT" at 2986,2868 h60
  text "SPI_EN/CLK" at 4517,2868 h60
  text "CLK_IN/Tana" at 5372,2868 h60
  text "GND/REQ" at 2143,2860.34 h60
  text "33/GND" at 682,2858.01 h60
  text "VDD/VDD20" at 1060,2858.01 h60
  text "EXP2/1" at 2620,2858.01 h60
  text "GND/RESET" at 4951,2858.01 h60
  text "ROUT4" at 3818,954 h60 r90
  text "ROUT3" at 3920,954 h60 r90
  text "ROUT2" at 4020,954 h60 r90
  text "ROUT1" at 4119,954 h60 r90
  text "REQ" at 4221,954 h60 r90
  text "EXP2" at 4321,954 h60 r90
  text "EXP1" at 4420,954 h60 r90
  text "SPI_IN" at 4521,954 h60 r90
  text "SPI_OUT" at 4620,954 h60 r90
  text "SPI_EN" at 4720,954 h60 r90
  text "SPI_CLK" at 4819,954 h60 r90
  text "RESET" at 4920,954 h60 r90
  text "CLK_IN" at 5021,954 h60 r90
  text "ОБЖИМ СОГЛАСНО РАСПИНОВКЕ" at 5679,756 h100 r90
  text "OUTCAM_CMV4000_VPL" at 3429,625 h60 r90